# Altium PCB CPU_Board.PcbDoc
Units mm, origin at the board's own origin, x right, y up, seen from the top; angles counter-clockwise.
Board outline 88 x 42 mm, 2 copper layers (Top Layer, Bottom Layer); 72 components, 78 nets, 308 pads, 88 vias.
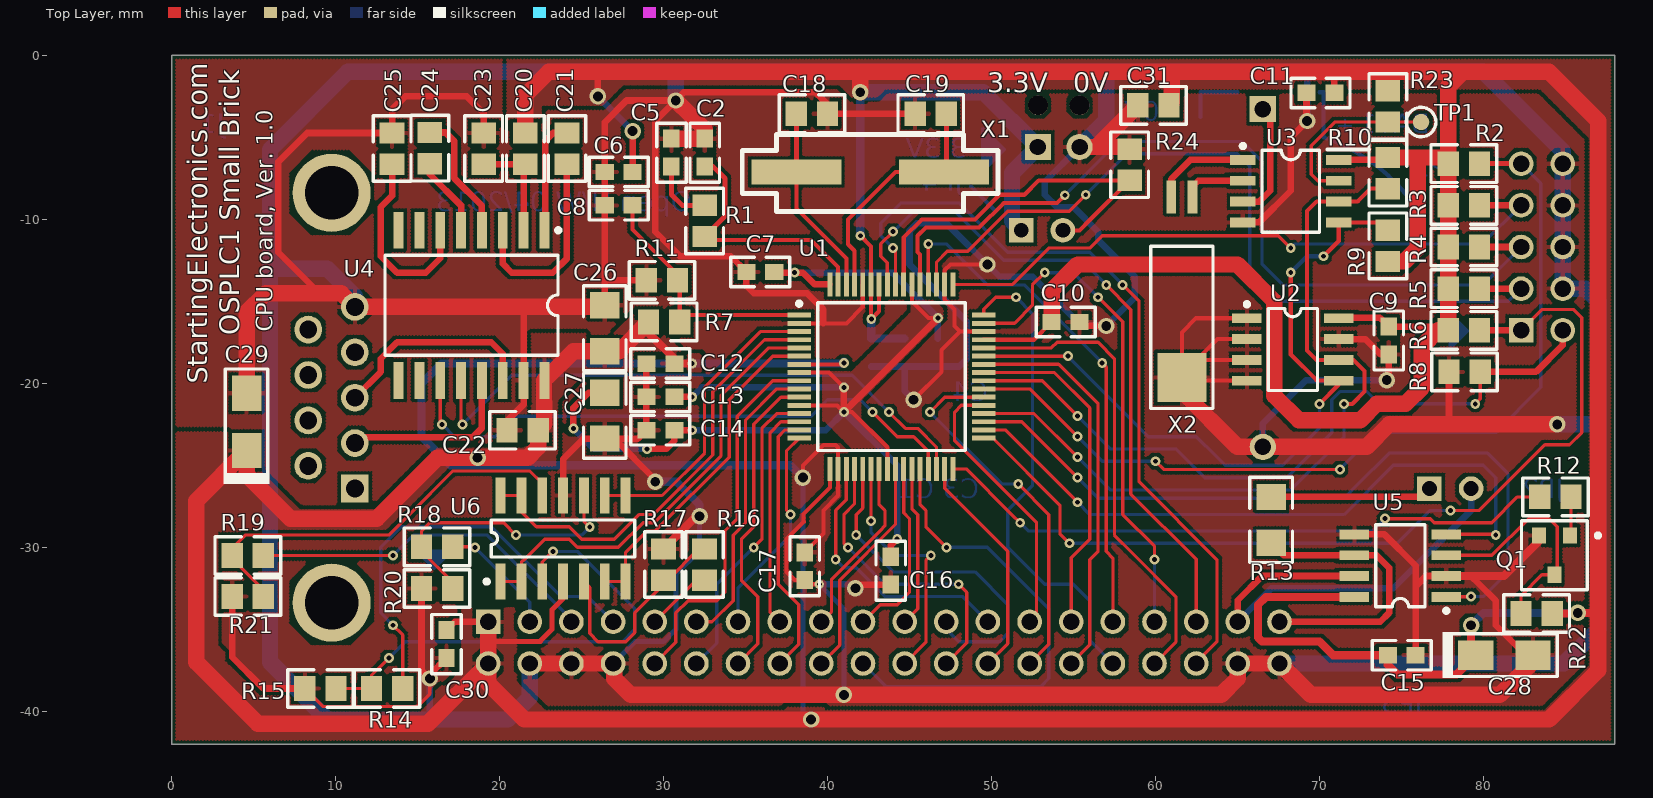
[diagram p0: Top Layer view]
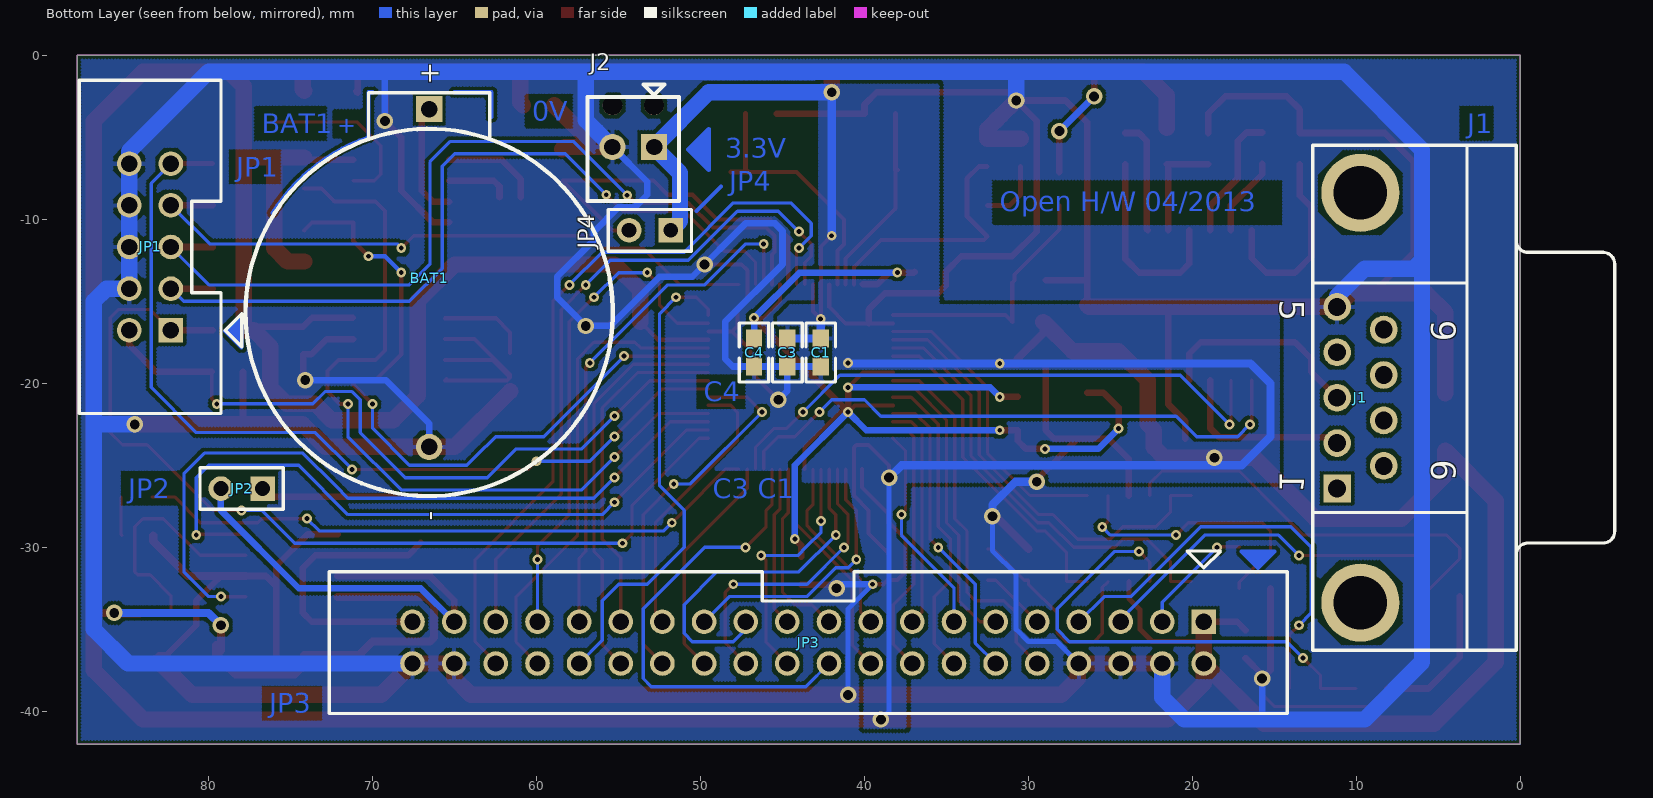
[diagram p1: Bottom Layer view, seen from below]

## Layer stack, top to bottom
Top Layer: signal copper 0.0356
Dielectric: dielectric 0.32, FR-4, Dk 4.8
Bottom Layer: signal copper 0.0356

## Board outline
0,-42 88,-42 88,0 0,0

## Design rules (kind name [scope] priority, off if disabled: settings)
Clearance [All] p1: gap=0.2
ComponentClearance [All] p1: gap=0.254 collisioncheckmode=0
HoleSize [All] p1: absolutevalues=TRUE maxlimit=5 minlimit=0.025 maxpercent=80.000 minpercent=20.000
PolygonConnect [All] p1: connectstyle=Relief reliefconductorwidth=0.254 reliefentries=4 polygonreliefangle="90 Angle"
RoutingLayers [All] p1: top layer=Horizontal bottom layer=Vertical
RoutingVias [All] p1: holewidth=0.3 width=0.6 viastyle="Through Hole" minholewidth=0.3 minwidth=0.6 maxholewidth=1 maxwidth=2
SolderMaskExpansion [All] p1: expansion=0.102
TestPointUsage [All] p1: valid=0 allowmultiple=FALSE
Testpoint [All] p1: side=15 testpointundercomponent=TRUE minsize=1.016 maxsize=2.54 preferedsize=1.524 minholesize=0 maxholesize=1.016 preferedholesize=0.813 testpointgrid=0.025 style=1023 order=-539222988
Width [All] p1: maxlimit=2 minlimit=0.2 preferedwidth=0.2 toplayer_prefwidth=0.25 minimp=50.000000 maximp=50.000000 favimp=50.000000
15 further rules are at their usual default settings.

## Components (designator, comment, footprint, x,y, rotation, side; value= is the part's Value field where it differs from the comment)
BAT1 "3V Battery" BATTERY_22MM 66.548,-23.876 r90 bottom
C1 "0603" 0603 42.672,-17.272 r270 bottom
C2 "0603" 0603 32.512,-5.08 r270 top
C3 "0603" 0603 44.704,-17.272 r270 bottom
C4 "0603" 0603 46.736,-17.272 r270 bottom
C5 "0603" 0603 30.48,-5.08 r270 top
C6 "0603" 0603 26.416,-7.112 r0 top (schematic designator C30)
C7 "0603" 0603 35.052,-13.208 r0 top (schematic designator C6)
C8 "0603" 0603 26.416,-9.144 r0 top (schematic designator C7)
C9 "0603" 0603 74.224,-16.536 r270 top (schematic designator C31)
C10 "0603" 0603 55.372,-16.256 r180 top (schematic designator C9)
C11 "0603" 0603 70.91,-2.29 r180 top (schematic designator C10)
C12 "0603" 0603 28.956,-18.796 r0 top (schematic designator C11)
C13 "0603" 0603 28.956,-20.828 r0 top (schematic designator C12)
C14 "0603" 0603 28.956,-22.86 r0 top (schematic designator C13)
C15 "0603" 0603 74.168,-36.576 r0 top (schematic designator C14)
C16 "0603" 0603 43.86,-30.574 r270 top (schematic designator C15)
C17 "0603" 0603 38.608,-32.004 r90 top (schematic designator C16)
C18 "0805" 0805 38.1,-3.556 r0 top (schematic designator C17)
C19 "0805" 0805 47.244,-3.556 r180 top (schematic designator C18)
C20 "0805" 0805 21.572,-4.732 r270 top (schematic designator C19)
C21 "0805" 0805 24.112,-4.732 r270 top (schematic designator C20)
C22 "0805" 0805 22.352,-22.86 r180 top (schematic designator C21)
C23 "0805" 0805 19.032,-4.732 r270 top (schematic designator C22)
C24 "0805" 0805 15.748,-6.604 r90 top (schematic designator C23)
C25 "0805" 0805 13.444,-4.732 r270 top (schematic designator C24)
C26 "1206 X7R" 1206 26.416,-15.24 r270 top
C27 "1206 X7R" 1206 26.416,-23.368 r90 top
C28 "Tant_A" CAP_TANT_A 81.28,-36.576 r180 top
C29 "Tant_A" CAP_TANT_A 4.572,-22.352 r270 top
C30 "0603" 0603 16.764,-35.052 r270 top
C31 "0805" 0805 58.928,-3.048 r0 top
J1 "DB9M" DB9M 11.176,-26.416 r270 bottom
J2 "Mini Screw Terminal" MINI_TERMINAL_2 55.372,-5.588 r180 bottom
JP1 "IDC10M" IDC_10M_BOX 82.296,-16.764 r270 bottom
JP2 "JUMPER2" JUMPER2_254 76.708,-26.416 r0 bottom
JP3 "IDC40M" IDC_40M_BOX 19.304,-34.544 r180 bottom
JP4 "JUMPER2" JUMPER2_254 51.816,-10.668 r0 bottom
Q1 "BC817-40" SO-G3/Y1 84.328,-30.48 r180 top
R1 "0805" 0805 32.512,-9.144 r270 top
R2 "0805" 0805 79.756,-6.604 r180 top
R3 "0805" 0805 79.756,-9.144 r180 top
R4 "0805" 0805 79.756,-11.684 r180 top
R5 "0805" 0805 79.756,-14.224 r180 top
R6 "0805" 0805 79.756,-16.764 r180 top
R7 "0805" 0805 30.988,-16.256 r180 top
R8 "0805" 0805 77.9,-19.3 r0 top
R9 "0805" 0805 74.168,-10.668 r270 top
R10 "0805" 0805 74.168,-8.128 r90 top
R11 "0805" 0805 28.956,-13.716 r0 top
R12 "0805" 0805 85.344,-26.924 r180 top
R13 "1206" 1206 67.056,-26.924 r270 top
R14 "0805" 0805 12.192,-38.608 r0 top
R15 "0805" 0805 8.128,-38.608 r0 top
R16 "0805" 0805 32.5,-30.1 r270 top
R17 "0805" 0805 30,-30.1 r270 top
R18 "0805" 0805 15.24,-29.972 r0 top
R19 "0805" 0805 3.7,-30.5 r0 top
R20 "0805" 0805 15.24,-32.512 r0 top
R21 "0805" 0805 3.7,-33 r0 top
R22 "0805" 0805 82.296,-34.036 r0 top
R23 "0805" 0805 74.168,-4.064 r90 top
R24 "0805" 0805 58.42,-7.62 r90 top
TP1 "TEST POINT" TEST_POINT 76.2,-4.064 r0 top
U1 "AT91SAM7S256" LQFP64-10-05 38.272,-15.842 r0 top
U2 "24LC64-I/SN" SO-G8/Z7.4 71.176,-16.028 r270 top
U3 "M41T00" SO-G8/X.6 71.176,-6.376 r270 top
U4 "MAX3232CWE" SO-G16/G6.9 18.288,-15.24 r180 top
U5 "ST3485EC" SO-G8/Z7.4 72.136,-33.02 r90 top
U6 "LM2902D" SO-G14/Y2.2 23.876,-29.464 r0 top
X1 "18.432MHz" CRYSTAL_SMT 38.1,-7.112 r0 top
X2 "32.768kHz" XTAL_TF 60.96,-8.636 r90 top

## Footprints (in the part's own frame and the unit in brackets; to place one, negate y for a bottom-side part, rotate by r counter-clockwise, add the part's x,y. Pads: shape width x height; smd on the part's side, far side on the other; paste and mask are expansions set on the pad)
0603 [mm]
  rect 1.1x1 smd: 1(0,0) 2(1.7,0)
  silkscreen extent -0.95,-0.9 2.65,0.9
0805 [mm]
  rect 1.3x1.5 smd: 1(0,0) 2(1.9,0)
  silkscreen extent -1.05,-1.15 2.95,1.15
1206 [mm]
  rect 1.6x1.8 smd: 1(0,0) 2(2.8,0)
  silkscreen extent -1.2,-1.3 4,1.3
BATTERY_22MM [mm] "Button battery, 22mm diameter"
  rect 1.6x1.6 hole 1: 1(20.6,0)
  round 1.6 hole 1: 2(0,0)
  silkscreen extent -3,-11.2 21.6,11.2
CAP_TANT_A [mm]
  rect 2.15x1.8 smd: 1(1.75,0) 2(-1.75,0)
  silkscreen extent -3.22,-1.4 3.77,1.4
CRYSTAL_SMT [mm] "Surface Mount Crystal"
  rect 5.5x1.5 smd: 1(0,0) 2(9,0)
  silkscreen extent -3.3,-2.4 12.3,2.3
DB9M [mm]
  rect 1.69x1.69 hole 1.09: 1(0,0)
  round 1.69 hole 1.09: 2(-2.77,0) 3(-5.54,0) 4(-8.31,0) 5(-11.08,0) 6(-1.385,2.84) 7(-4.155,2.84) 8(-6.925,2.84) 9(-9.695,2.84)
  round 4.76 hole 3.26: 10(6.955,1.42) 11(-18.035,1.42)
  silkscreen extent -20.94,-1.48 9.86,16.92
IDC_10M_BOX [mm]
  rect 1.5x1.5 hole 1: 1(0,0)
  round 1.5 hole 1: 2(0,-2.54) 3(-2.54,0) 4(-2.54,-2.54) 5(-5.08,0) 6(-5.08,-2.54) 7(-7.62,0) 8(-7.62,-2.54) 9(-10.16,0) 10(-10.16,-2.54)
  silkscreen extent -15.24,-5.59 5.08,4.32
IDC_40M_BOX [mm]
  rect 1.5x1.5 hole 1: 1(0,0)
  round 1.5 hole 1: 2(0,-2.54) 3(-2.54,0) 4(-2.54,-2.54) 5(-5.08,0) 6(-5.08,-2.54) 7(-7.62,0) 8(-7.62,-2.54) 9(-10.16,0) 10(-10.16,-2.54) 11(-12.7,0) 12(-12.7,-2.54) 13(-15.24,0) 14(-15.24,-2.54) 15(-17.78,0) 16(-17.78,-2.54) 17(-20.32,0) 18(-20.32,-2.54) 19(-22.86,0) 20(-22.86,-2.54) 21(-25.4,0) 22(-25.4,-2.54) 23(-27.94,0) 24(-27.94,-2.54) 25(-30.48,0) 26(-30.48,-2.54) 27(-33.02,0) 28(-33.02,-2.54) 29(-35.56,0) 30(-35.56,-2.54) 31(-38.1,0) 32(-38.1,-2.54) 33(-40.64,0) 34(-40.64,-2.54) 35(-43.18,0) 36(-43.18,-2.54) 37(-45.72,0) 38(-45.72,-2.54) 39(-48.26,0) 40(-48.26,-2.54)
  silkscreen extent -53.34,-5.59 5.08,4.32
JUMPER2_254 [mm]
  rect 1.5x1.5 hole 0.9: 1(0,0)
  round 1.5 hole 0.9: 2(2.54,0)
  silkscreen extent -1.27,-1.27 3.81,1.27
LQFP64-10-05 [mm] "LQFP64 10 x 10 x 1.4mm"
  rect 1.45x0.3 smd: 1(0,0) 2(0,-0.5) 3(0,-1) 4(0,-1.5) 5(0,-2) 6(0,-2.5) 7(0,-3) 8(0,-3.5) 9(0,-4) 10(0,-4.5) 11(0,-5) 12(0,-5.5) 13(0,-6) 14(0,-6.5) 15(0,-7) 16(0,-7.5) 33(11.25,-7.5) 34(11.25,-7) 35(11.25,-6.5) 36(11.25,-6) 37(11.25,-5.5) 38(11.25,-5) 39(11.25,-4.5) 40(11.25,-4) 41(11.25,-3.5) 42(11.25,-3) 43(11.25,-2.5) 44(11.25,-2) 45(11.25,-1.5) 46(11.25,-1) 47(11.25,-0.5) 48(11.25,0)
  rect 0.3x1.45 smd: 17(1.875,-9.375) 18(2.375,-9.375) 19(2.875,-9.375) 20(3.375,-9.375) 21(3.875,-9.375) 22(4.375,-9.375) 23(4.875,-9.375) 24(5.375,-9.375) 25(5.875,-9.375) 26(6.375,-9.375) 27(6.875,-9.375) 28(7.375,-9.375) 29(7.875,-9.375) 30(8.375,-9.375) 31(8.875,-9.375) 32(9.375,-9.375) 49(9.375,1.875) 50(8.875,1.875) 51(8.375,1.875) 52(7.875,1.875) 53(7.375,1.875) 54(6.875,1.875) 55(6.375,1.875) 56(5.875,1.875) 57(5.375,1.875) 58(4.875,1.875) 59(4.375,1.875) 60(3.875,1.875) 61(3.375,1.875) 62(2.875,1.875) 63(2.375,1.875) 64(1.875,1.875)
  silkscreen extent -0.12,-8.25 10.12,0.82
MINI_TERMINAL_2 [mm] "2 pin mini screw terminal, 2.54mm spacing"
  round 1.2 hole 1.2 unplated: 0(0,2.54) 0(2.54,2.54)
  rect 1.6x1.6 hole 1: 1(2.54,0)
  round 1.6 hole 1: 2(0,0)
  silkscreen extent -1.52,-3.3 4.06,3.81
SO-G3/Y1 [mm]
  rect 0.85x1 smd: 1(-0.95,-1.2) 2(0.95,-1.2) 3(0,1.2)
  silkscreen extent -2.78,-2.1 2,2.1
SO-G8/X.6 [mm]
  rect 0.6x1.55 smd: 1(0,-5.85) 2(1.27,-5.85) 3(2.54,-5.85) 4(3.81,-5.85) 5(3.81,0) 6(2.54,0) 7(1.27,0) 8(0,0)
  silkscreen extent -0.97,-5.97 4.4,-1.18
SO-G8/Z7.4 [mm]
  rect 0.6x1.8 smd: 1(0,-5.6) 2(1.27,-5.6) 3(2.54,-5.6) 4(3.81,-5.6) 5(3.81,0) 6(2.54,0) 7(1.27,0) 8(0,0)
  silkscreen extent -0.97,-5.72 4.41,-1.3
SO-G14/Y2.2 [mm]
  rect 0.6x2.2 smd: 1(-3.81,-2.625) 2(-2.54,-2.625) 3(-1.27,-2.625) 4(0,-2.625) 5(1.27,-2.625) 6(2.54,-2.625) 7(3.81,-2.625) 8(3.81,2.625) 9(2.54,2.625) 10(1.27,2.625) 11(0,2.625) 12(-1.27,2.625) 13(-2.54,2.625) 14(-3.81,2.625)
  silkscreen extent -4.78,-2.75 4.38,1.13
SO-G16/G6.9 [mm]
  rect 0.6x2.25 smd: 1(-4.445,-4.575) 2(-3.175,-4.575) 3(-1.905,-4.575) 4(-0.635,-4.575) 5(0.635,-4.575) 6(1.905,-4.575) 7(3.175,-4.575) 8(4.445,-4.575) 9(4.445,4.575) 10(3.175,4.575) 11(1.905,4.575) 12(0.635,4.575) 13(-0.635,4.575) 14(-1.905,4.575) 15(-3.175,4.575) 16(-4.445,4.575)
  silkscreen extent -5.42,-4.7 5.27,3.05
TEST_POINT [mm]
  round 1 smd: 1(0,0)
  silkscreen extent -0.9,-0.9 0.9,0.9
XTAL_TF [mm]
  rect 2x0.6 smd: 1(0,0) 2(0,-1.3)
  rect 3x3 smd: 3(-11,-0.65)
  silkscreen extent -12.9,-2.55 -3,1.25

## Part data
BAT1: library part BATTERY_22MM, "3 Volt Lithium Button Battery"
C1 C2 C3 C4 C5 C6 C7 C8 C9 C10 C11 C12 C13 C14 C15 C16 C17 C30: library part CAP_0603, "0603 footprint non-polorised capacitor"
C18 C19 C20 C21 C22 C23 C24 C25 C31: library part CAP_0805, "0805 footprint non-polarised capacitor"
C26 C27: library part CAP_1206, "1206 footprint non-polorised capacitor"
C28 C29: library part CAP_TANT_A, "Tantalum Capacitor, A Package"
J1: "DB 9 Male connector"
J2: library part MINI_TERMINAL_2, "Mini Screw Terminal, 2.54mm Pitch"
JP1: library part IDC_10M, "10 pin IDC male connector, vertical, box"
JP2 JP4: "2 Pin Jumper, 2.54mm"
JP3: library part IDC_40M, "40 pin IDC male connector, vertical, box"
Q1: "NPN General Purpose Amplifier"
R1 R2 R3 R4 R5 R6 R7 R8 R9 R10 R11 R12 R14 R15 R16 R17 R18 R19 R20 R21 R22 R23 R24: library part RES_0805, "0805 footprint resistor"
R13: library part RES_1206, "1206 footprint resistor"
TP1: library part TEST_POINT
U1: "Atmel ARM7 microcontroller, 256k Flash"
U2: "Microchip 64k bit I2C bus serial EEPROM"
U3: "ST Serial Access Timekeeper"
U4: "3.0V TO 5.5V, Low-Power, up to 1Mbps, True RS-232 Transceiver Using Four 0.1µF External Capacitor"
U5: "ST 3.3v RS-485/RS-422 Transceiver"
U6: "Quad Low-Power Operational Amplifier"
X1: library part CRYSTAL_SMT, "SMT crystal"
X2: library part CRYSTAL_TF, "Tuning Fork Crystal"

## Via types
v1: diameter 0.6, hole 0.3, Top Layer to Bottom Layer, 68 vias
v2: diameter 1, hole 0.6, Top Layer to Bottom Layer, 20 vias

## Nets (pads, with @x,y where several pads share a name; then routed paths per layer and width w, separated by ;. In a path a pad name is that pad's centre, name@x,y a point inside that pad or via, vN(x,y) a via of type N, cw(c..) or ccw(c..) an arc to the next point about the centre after c; other vN are vias at no path point)
AD4: U1.3 U6.8 U6.9 | length 18.3
  Top Layer w0.2: U6.9 29.911,-26.839 32.5,-24.25 32.5,-20.25 35.908,-16.842 U1.3
AD5: U1.4 U6.13 U6.14 | length 27.2
  Top Layer w0.2: U6.14 U6.13 21.336,-27.836 22.25,-28.75 24.25,-28.75 25,-29.5 27,-29.5 28.338,-28.162 28.5,-28 29.369,-28 33,-24.369 33,-20.5 36.158,-17.342 U1.4
AD6: U1.5 U6.1 U6.2 | length 27.4
  Top Layer w0.2: U6.1 U6.2 21.336,-30.914 21.567,-30.683 22.75,-29.5 24.25,-29.5 24.75,-30 27.25,-30 28.75,-28.5 29.434,-28.5 33.5,-24.434 33.5,-20.75 36.408,-17.842 U1.5
AD7: U1.6 U6.6 U6.7 | length 20.6
  Top Layer w0.2: U6.6 U6.7 27.686,-30.314 29,-29 29.5,-29 34,-24.5 34,-21 36.658,-18.342 U1.6
AN1: JP3.3 R18.2 | length 7.3
  Top Layer w0.2: R18.2 18.472,-29.972 v1(18.5,-30)
  Bottom Layer w0.2: v1(18.5,-30) 21.844,-33.344 JP3.3
AN2: JP3.5 R19.2 | length 21.6
  Top Layer w0.2: R19.2 v1(13.5,-30.5)
  Bottom Layer w0.2: v1(13.5,-30.5) 14.75,-29.25 19.25,-29.25 24.384,-34.384 JP3.5
AN3: JP3.7 R14.2 | length 26.3
  Top Layer w0.2: v1(13.5,-34.75) 14.092,-35.342 R14.2
  Bottom Layer w0.2: v1(13.5,-34.75) 12.75,-34 12.75,-30 14,-28.75 19.5,-28.75 23.75,-33 25.38,-33 JP3.7
AN4: JP3.9 R16.2 | length 4.1
  Top Layer w0.2: JP3.9 29.464,-34.536 32,-32 R16.2
DDM: JP3.36 U1.56 | length 47.4
  Top Layer w0.2: v1(44,-11.75) 44.147,-11.897 U1.56 ; v1(58,-14) 59,-15 59,-26 63.75,-30.75 63.75,-35.75 62.484,-37.016 JP3.36
  Bottom Layer w0.2: v1(44,-11.75) 43.25,-11 43.25,-10.25 44.5,-9 48,-9 51,-12 56,-12 v1(58,-14)
DDP: JP3.35 U1.57 | length 41.9
  Top Layer w0.2: U1.57 43.647,-12.647 43.25,-12.25 43.25,-11.5 v1(44,-10.75) ; v1(57,-14) 58.5,-15.5 58.5,-26.75 62.484,-30.734 JP3.35
  Bottom Layer w0.2: v1(44,-10.75) 45.25,-9.5 47.75,-9.5 50.75,-12.5 55.5,-12.5 v1(57,-14)
DRXD: U1.30 U4.12 | length 36
  Top Layer w0.2: U4.12 17.653,-22.403 v1(17.75,-22.5) ; v1(43.75,-21.75) 44.75,-22.75 45.5,-22.75 46.647,-23.897 U1.30
  Bottom Layer w0.2: v1(17.75,-22.5) 20.75,-19.5 41.5,-19.5 v1(43.75,-21.75)
DTXD: U1.29 U4.11 | length 36
  Top Layer w0.2: U4.11 16.383,-22.383 v1(16.5,-22.5) ; v1(42.75,-21.75) 44.25,-23.25 45.25,-23.25 46.147,-24.147 U1.29
  Bottom Layer w0.2: v1(16.5,-22.5) 17.25,-23.25 19.75,-23.25 21,-22 39,-22 40,-21 42,-21 v1(42.75,-21.75)
GND: BAT1.2 C1.2 C2.1 C3.2 C4.2 C5.1 C6.1 C7.1 C8.1 C9.2 C10.1 C11.2 C12.1 C13.1 C14.1 C15.2 C16.2 C17.1 C18.2 C19.2 C22.2 C23.1 C25.1 C26.1 C27.1 C28.2 C29.2 C30.2 C31.1 J1.5 J2.2 JP1.4 JP1.6 JP1.8 JP1.10 JP3.4 JP3.6 JP3.8 JP3.38 JP3.40 Q1.2 R8.1 R11.1 R15.1 R17.1 R20.1 R21.1 R24.2 U1.2 U1.17 U1.46 U1.50 U1.60 U2.1 U2.2 U2.3 U2.4 U2.7 U3.4 U4.15 U5.2 U5.5 U6.11 X2.3 | length 651.8
  Top Layer w0.2: R15.1 9.22,-39.7 15,-39.7 15.75,-38.95 v2(15.75,-38) ; U1.17@40.147,-25.353 U1.17
  Top Layer w0.25: U1.2 41.158,-16.342 42.147,-15.353 U1.60 ; 38.542,-28.442 38.542,-27.958 40.147,-26.353 U1.17 ; 38.55,-28.45 37.5,-29.5 37.5,-31.5 38.004,-32.004 C17.1 38.854,-32.25 v1(39.5,-32.25) ; v2(45.25,-21) 46.955,-19.295 46.955,-17.979 48.092,-16.842 ; U1.46 48.092,-16.842 ; v2(49.75,-12.75) 47.5,-12.75 47.147,-13.103 47.147,-14.897 47.75,-15.5 47.75,-16.5 48.092,-16.842 ; X2.3@61.61,-18.14 61.61,-16.89 62.472,-16.028 U2.1 ; U2.4@65.5,-19.762 U2.4@65.5,-19.75 ; U2.4 61.812,-19.838 X2.3 ; U2.3 62.678,-18.568 X2.3 ; U2.2 63.776,-17.298 61.61,-19.464 X2.3
  Top Layer w0.4: R21.1 3.7,-36.7 5.608,-38.608 R15.1 ; 9,-14.5 6.5,-12 6.5,-6.5 8.268,-4.732 C25.1 13.444,-3.306 14.25,-2.5 18,-2.5 19.032,-3.532 C23.1 ; R20.1 15.24,-37.49 v2(15.75,-38) 15.75,-37.766 C30.2 ; C22.2@20.452,-23.368 20.452,-22.298 21.463,-21.287 21.463,-15.373 21.5,-15.336 ; U6.11 23.876,-24.624 25.132,-23.368 26.992,-23.368 29.5,-25.876 v2(29.5,-26) ; C27.1 C27.1@26.424,-23.376 ; 26.416,-13.75 26.45,-13.716 R11.1 ; C26.1@26.45,-15.206 C26.1 C8.1 C6.1 26.416,-4.084 27.75,-2.75 v2(30.75,-2.75) ; C27.1@27,-23.376 28.44,-23.376 C14.1 C13.1 C12.1 ; 39.75,-16.342 39.75,-15.5 38.75,-14.5 35.5,-14.5 35.052,-14.052 C7.1 34.094,-12.25 31,-12.25 29.5,-10.75 29.5,-4 31.25,-2.25 39.25,-2.25 40,-3 C18.2 C19.2 ; v2(41.7,-32.5) 41.926,-32.274 C16.2 ; C10.1 55.616,-16.5 v2(57,-16.5) ; U3.4 66.314,-10.186 68.25,-8.25 68.25,-5 v2(69.25,-4) ; v2@69.21,-3.96 C11.2 ; U2.7 72.798,-17.298 73.736,-18.236 C9.2 74.224,-19.676 v2(74.1,-19.8) ; U5.5 73.96,-29.21 75.868,-31.118 C15.2 ; 75.868,-32.382 76.5,-31.75 U5.2 ; 77.75,-22.5 77.9,-22.35 R8.1 ; 79.25,-31.75 79.75,-32.25 80.75,-33.25 80.75,-34.75 82.576,-36.576 C28.2
  Top Layer w0.5: R17.1 32,-28.1 v2(32.2,-28.1) ; U5.2 81.25,-31.75 83.378,-29.622 Q1.2
  Top Layer w1: C29.2 4.572,-15.678 5.75,-14.5 10.34,-14.5 J1.5 26.32,-15.336 C26.1 ; JP3.4 JP3.6 26.916,-37.084 27,-37 27,-38 28,-39 64,-39 65.024,-37.976 JP3.38 JP3.40@67.584,-37.084 ; C5.1 C2.1 32.512,-4.512 31.655,-3.655 ; v2(30.75,-2.75) 31.655,-3.655 ; 32.004,-4.004 31.655,-3.655 ; J2.2 58.288,-5.588 R24.2 ; 56.388,-5.588 C31.1 ; X2.3@61.61,-20.486 65,-23.876 72.874,-23.876 74.25,-22.5 v2(84.5,-22.5) ; JP3.40 69.48,-39 81,-39 C28.2@83.03,-36.97
  Bottom Layer w0.3: JP3.8 28.258,-35.75 30,-35.75 30.75,-35 30.75,-31.65 32.2,-30.2 v2(32.2,-28.1) ; v1(39.5,-32.25) 41,-33.75 v2(41,-39)
  Bottom Layer w0.4: 15.75,-40.5 v2(15.75,-38) ; v1(39.5,-32.25) 41.45,-32.25 v2(41.7,-32.5) ; C1.2 C4.2 48.028,-18.972 48.5,-18.5 48.5,-16.25 45,-12.75 45,-10.708 45.458,-10.25 47.25,-10.25 50.5,-13.5 52.5,-13.5 55.5,-16.5 v2(57,-16.5) 57.408,-16.092 58.75,-14.75 58.75,-13.5 56.5,-11.25 56.5,-10.75 55,-9.25 54,-9.25 53.25,-8.5 53.25,-7.71 J2.2 ; C3.2 44.704,-20.454 v2(45.25,-21) ; BAT1.2 66.548,-22.452 69.2,-19.8 v2(74.1,-19.8) ; v2(69.25,-4) 69.25,-1
  Bottom Layer w0.5: v2(29.5,-26) 30.8,-26 32.2,-27.4 v2(32.2,-28.1)
  Bottom Layer w1: 6,-12.5 6.5,-13 9.5,-13 11.176,-14.676 J1.5 ; JP3.4 21.844,-39.156 20.5,-40.5 9.5,-40.5 6,-37 6,-5.75 10.75,-1 80,-1 84.836,-5.836 JP1.8 JP1.6 JP1.4 86.224,-14.224 87,-15 87,-35 84.916,-37.084 JP3.40 ; v2(30.75,-2.75) 30.75,-1.25 ; J2.2 56.324,-4.636 57,-3.96 57,-1 ; v2(84.5,-22.5) 87,-22.5
NetBAT1_1: BAT1.1 U3.3 | length 7.1
  Top Layer w0.4: U3.3 66.334,-8.916 67,-8.25 67,-3.728 BAT1.1
NetC2_2: C2.2 R1.2 U1.63 | length 15.6
  Top Layer w0.25: R1.2 32.718,-11.25 39,-11.25 40.647,-12.897 U1.63
  Top Layer w0.3: R1.2 33.75,-9.806 33.75,-7.5 33.03,-6.78 C2.2
NetC5_2: C5.2 R1.1 | length 4
  Top Layer w0.3: C5.2 30.48,-8.48 31.144,-9.144 R1.1
NetC8_2: C8.2 R7.1 R11.2 U1.1 | length 15.8
  Top Layer w0.25: C8.2 28.116,-10.616 30.856,-13.356 R11.2 30.988,-13.848 R7.1 31.402,-15.842 U1.1
NetC18_1: C18.1 U1.62 X1.1 | length 11.8
  Top Layer w0.25: X1.1@38.1,-7 38.1,-9.35 41.147,-12.397 U1.62
  Top Layer w0.3: X1.1@38,-7 X1.1@38.1,-6.9 ; X1.1@38.1,-7 C18.1
NetC19_1: C19.1 U1.61 X1.2 | length 15.8
  Top Layer w0.25: U1.61 41.647,-11.914 41.25,-11.517 41.25,-10 44.138,-7.112 X1.2
  Top Layer w0.3: C19.1 47.244,-6.968 X1.2 X1.2@48.138,-7.112
NetC20_2: C20.2 C23.2 U4.2 | length 6.6
  Top Layer w0.4: C23.2 C20.2 21.463,-6.741 U4.2
NetC21_1: C21.1 U4.1 | length 7
  Top Layer w0.4: U4.1 22.8,-10.598 22.8,-5.2 23.268,-4.732 C21.1
NetC21_2: C21.2 U4.3 | length 12.3
  Top Layer w0.4: U4.3 20.193,-12.693 20.75,-13.25 23.25,-13.25 24.112,-12.388 C21.2
NetC24_1: C24.1 U4.5 | length 4.9
  Top Layer w0.4: C24.1 15.748,-7.248 17.653,-9.153 U4.5
NetC24_2: C24.2 U4.4 | length 7.8
  Top Layer w0.4: C24.2 16.704,-4.704 17.25,-5.25 17.25,-7.5 18.923,-9.173 U4.4
NetC25_2: C25.2 U4.6 | length 12
  Top Layer w0.4: C25.2 13.444,-8.556 12.75,-9.25 12.75,-12.25 13.75,-13.25 15.5,-13.25 16.383,-12.367 U4.6
NetJ1_2: J1.2 U4.13 | length 11
  Top Layer w0.4: J1.2 11.522,-23.3 18.346,-23.3 18.923,-22.723 U4.13
NetJ1_3: J1.3 U4.14 | length 12.8
  Top Layer w0.4: J1.3 12.75,-19.302 12.75,-18.5 13.75,-17.5 19.5,-17.5 20.193,-18.193 U4.14
NetJP1_1: JP1.1 R6.1 U1.33 | length 56.9
  Top Layer w0.2: U1.33 50.092,-23.342 54.177,-27.427 54.177,-29.177 v1(54.75,-29.75) ; v1(78,-27.75) 79.75,-27.75 83.75,-23.75 85.25,-23.75 86,-23 86,-16 85.5,-15.5 83.56,-15.5 JP1.1
  Top Layer w0.4: R6.1 JP1.1
  Bottom Layer w0.2: v1(54.75,-29.75) 74.75,-29.75 76.75,-27.75 v1(78,-27.75)
NetJP1_2: JP1.2 R8.2 U1.40 | length 44.8
  Top Layer w0.2: U1.40 53.092,-19.842 v1(55.25,-22) ; v1(79.5,-21.25) 79.8,-20.95 R8.2
  Top Layer w0.4: R8.2 83.2,-19.3 84.836,-17.664 JP1.2
  Bottom Layer w0.2: v1(55.25,-22) 57.25,-24 61.25,-24 63,-25.75 68,-25.75 70.75,-23 70.75,-21 71.25,-20.5 72.9,-20.5 73.65,-21.25 v1(79.5,-21.25)
NetJP1_3: JP1.3 R5.1 U1.51 | length 50
  Top Layer w0.2: U1.51 46.647,-12.603 47.305,-11.945 48.555,-11.945 51,-9.5 54.75,-9.5 v1(55.75,-8.5)
  Top Layer w0.4: R5.1 JP1.3
  Bottom Layer w0.2: v1(55.75,-8.5) 58.25,-6 65,-6 65.75,-6.75 65.75,-13 67.75,-15 81.52,-15 JP1.3
NetJP1_5: JP1.5 R4.1 U1.53 | length 53
  Top Layer w0.25: U1.53 45.647,-12.147 45.5,-12 45.5,-11 46,-10.5 49.25,-10.5 50.75,-9 54,-9 v1(54.472,-8.528)
  Top Layer w0.4: R4.1 JP1.5
  Bottom Layer w0.2: v1(54.472,-8.528) 56.42,-6.58 57.75,-5.25 65.25,-5.25 66.5,-6.5 66.5,-12.75 67.75,-14 79.98,-14 JP1.5
NetJP1_7: JP1.7 R3.1 U1.49 | length 39.8
  Top Layer w0.2: U1.49 51.283,-13.967 53.5,-11.75 56,-11.75 56.75,-11 67.5,-11 v1(68.25,-11.75)
  Top Layer w0.4: R3.1 JP1.7
  Bottom Layer w0.2: v1(68.25,-11.75) 68.5,-11.5 79.94,-11.5 JP1.7
NetJP1_9: JP1.9 R2.1 U1.39 | length 54.8
  Top Layer w0.2: U1.39 52.342,-20.342 v1(55.25,-23.25) ; v1(60,-24.75) 60.5,-25.25 v1(71.25,-25.25)
  Top Layer w0.3: R2.1 JP1.9
  Bottom Layer w0.2: v1(55.25,-23.25) 56.75,-24.75 v1(60,-24.75) ; v1(71.25,-25.25) 73.5,-23 80.75,-23 83.5,-20.25 83.5,-7.808 JP1.9
NetJP2_1: JP2.1 R13.1 | length 9.9
  Top Layer w0.4: R13.1 76.2,-26.924 JP2.1
NetJP2_2: JP2.2 JP3.37 U5.7 | length 27.4
  Top Layer w0.4: JP3.37 65.024,-33.226 66.5,-31.75 U5.7
  Bottom Layer w0.4: JP3.37 67.068,-32.5 74.5,-32.5 79.248,-27.752 JP2.2
NetJP3_39: JP3.39 R13.2 U5.6 | length 17.5
  Top Layer w0.4: R13.2 67.812,-30.48 U5.6 73.48,-30.48 74.25,-31.25 74.25,-34 73.706,-34.544 JP3.39
NetJP4_2: JP4.2 R24.1 U1.55 | length 23.4
  Top Layer w0.25: U1.55 44.647,-11.103 45.75,-10 49,-10 50.5,-8.5 52,-8.5 52.88,-7.62 R24.1 56.017,-10.023 55.372,-10.668 JP4.2
NetQ1_1: Q1.1 R12.1 | length 2.4
  Top Layer w0.2: Q1.1 85.344,-29.214 R12.1
NetQ1_3: Q1.3 R22.1 U5.3 | length 14.5
  Top Layer w0.2: U5.3 80.52,-30.48 82.75,-28.25 84,-28.25 84.5,-28.75 84.5,-31.508 Q1.3 83.57,-31.68 82.296,-32.954 R22.1
NetR12_2: R12.2 U1.32 | length 38.4
  Top Layer w0.2: U1.32 48.467,-25.217 51.25,-28 v1(51.75,-28.5) ; v1(74,-28.25) 76.75,-28.25 77,-28.5 80.5,-28.5 82.076,-26.924 R12.2
  Bottom Layer w0.2: v1(51.75,-28.5) 52.25,-29 73.25,-29 v1(74,-28.25)
NetR14_1: R14.1 R15.2 U6.3 | length 30
  Top Layer w0.2: R15.2 R14.1 12.192,-37.808 v1(13.25,-36.75) ; U6.3 22.606,-30.894 v1(23.25,-30.25)
  Bottom Layer w0.2: v1(13.25,-36.75) 14.25,-35.75 27.5,-35.75 28.25,-35 28.25,-33.75 24.75,-30.25 v1(23.25,-30.25)
NetR16_1: R16.1 R17.2 U6.5 | length 13.7
  Top Layer w0.2: U6.5 25.5,-32.443 25.5,-35.25 26,-35.75 27.7,-35.75 28.25,-35.2 28.25,-34 30,-32.25 R17.2 30.25,-32 32.15,-30.1 R16.1
NetR18_1: R18.1 R20.2 U6.10 | length 17.3
  Top Layer w0.2: R20.2 17.14,-32.14 15.24,-30.24 15.24,-29.01 15.75,-28.5 20.25,-28.5 v1(21,-29.25) ; U6.10 25.146,-28.396 v1(25.5,-28.75)
  Bottom Layer w0.2: v1(21,-29.25) 25,-29.25 v1(25.5,-28.75)
NetR19_1: R19.1 R21.2 U6.12 | length 25.6
  Top Layer w0.2: R21.2 5.6,-32.6 3.7,-30.7 3.7,-30.05 4.5,-29.25 13.25,-29.25 14.464,-28.036 17.154,-25.346 21.846,-25.346 22.606,-26.106 U6.12
NetR23_1: R23.1 TP1.1 U3.7 | length 10.9
  Top Layer w0.2: U3.7 69.896,-7.646 69.5,-7.25 69.5,-5.5 70.936,-4.064 TP1.1
NetU1_34: U1.34 U5.4 | length 41.4
  Top Layer w0.2: U1.34 50.842,-22.842 v1(55.25,-27.25) ; U5.4 80.71,-29.21 v1(80.75,-29.25)
  Bottom Layer w0.2: v1(55.25,-27.25) 56,-28 71.5,-28 74.5,-25 80,-25 80.75,-25.75 v1(80.75,-29.25)
NetU1_35: U1.35 U5.1 | length 46
  Top Layer w0.2: U1.35 51.842,-22.342 v1(55.25,-25.75) ; U5.1 79.23,-33.02 v1(79.25,-33)
  Bottom Layer w0.2: v1(55.25,-25.75) 56.5,-27 71.5,-27 72.25,-26.25 74.25,-24.25 80.25,-24.25 81.5,-25.5 81.5,-31.5 80,-33 v1(79.25,-33)
NetU3_1: U3.1 X2.1 | length 5.9
  Top Layer w0.4: X2.1 60.96,-7.54 62.124,-6.376 U3.1
NetU3_2: U3.2 X2.2 | length 3.9
  Top Layer w0.4: X2.2 62.26,-7.99 62.604,-7.646 U3.2
PA0: JP3.32 U1.48 | length 29.7
  Top Layer w0.2: U1.48 49.522,-15.478 50.25,-14.75 v1(51.5,-14.75)
  Bottom Layer w0.2: v1(51.5,-14.75) 52.5,-15.75 52.5,-26.25 51,-27.75 51,-30 53.25,-32.25 55,-32.25 56,-33.25 56,-35.68 JP3.32
PA1: JP3.33 U1.47 | length 30.8
  Top Layer w0.2: U1.47 51.408,-16.342 52.5,-15.25 52.5,-14 v1(53.25,-13.25) ; v1(56.5,-14.75) 58,-16.25 58,-28 59.944,-29.944 v1(59.944,-30.75)
  Bottom Layer w0.2: v1(53.25,-13.25) 55,-13.25 v1(56.5,-14.75) ; JP3.33 v1(59.944,-30.75)
PA2: JP3.34 U1.44 | length 29.2
  Top Layer w0.2: U1.44 53.658,-17.842 54,-17.5 56.5,-17.5 57.5,-18.5 57.5,-29.25 58.625,-30.375 61.25,-33 61.25,-35.778 JP3.34
PA8: JP3.26 U1.31 | length 14
  Top Layer w0.2: U1.31 47.147,-26.397 51,-30.25 51,-35.868 JP3.26
PA11: JP3.20 U1.28 | length 29.6
  Top Layer w0.2: U1.28 45.647,-27.397 46,-27.75 46,-28.75 v1(47.25,-30)
  Bottom Layer w0.2: JP3.20 43.58,-38.5 53,-38.5 53.5,-38 53.5,-33.75 49.75,-30 v1(47.25,-30)
PA12: JP3.21 U1.27 | length 9.8
  Top Layer w0.2: JP3.21 45.5,-33.748 45.5,-28 45.147,-27.647 U1.27
PA13: JP3.22 U1.22 | length 15.4
  Top Layer w0.2: v1(42.647,-28.397) U1.22 ; JP3.22 46,-35.788 46,-30.8 v1(46.3,-30.5)
  Bottom Layer w0.2: v1(42.647,-28.397) 42.647,-29.081 43.508,-29.942 44.066,-30.5 v1(46.3,-30.5)
PA14: JP3.23 U1.21 | length 21.7
  Top Layer w0.2: v1(41.75,-29.25) 41.75,-28 42.147,-27.603 U1.21
  Bottom Layer w0.2: v1(41.75,-29.25) 44,-31.5 49,-31.5 51,-33.5 51,-35.25 50.5,-35.75 48,-35.75 47.244,-34.994 JP3.23
PA15: JP3.24 U1.20 | length 18.4
  Top Layer w0.2: v1(41.25,-30) 41,-29.75 41,-28 41.647,-27.353 U1.20 ; JP3.24 48.5,-35.828 48.5,-32.75 v1(48,-32.25)
  Bottom Layer w0.2: v1(41.25,-30) 43.5,-32.25 v1(48,-32.25)
PA16: JP3.25 U1.19 | length 16.7
  Top Layer w0.2: v1(40.5,-30.75) 40.5,-27.75 41.147,-27.103 U1.19
  Bottom Layer w0.2: v1(40.5,-30.75) 40.987,-31.237 41.75,-31.237 43.513,-33 48.24,-33 JP3.25
PA17: JP3.10 U1.9 | length 22.9
  Top Layer w0.2: JP3.10 30.75,-35.798 30.75,-34 31.5,-33.25 33.25,-33.25 33.75,-32.75 33.75,-29 34.5,-28.25 34.5,-22 36.658,-19.842 U1.9
PA18: JP3.11 U1.10 | length 18.2
  Top Layer w0.2: JP3.11 32.956,-34.544 34.25,-33.25 34.25,-29.25 35,-28.5 35,-22.25 36.908,-20.342 U1.10
PA19: JP3.12 U1.13 | length 18.6
  Top Layer w0.2: v1(35.5,-30) 36,-29.5 36,-22.75 36.908,-21.842 U1.13
  Bottom Layer w0.2: JP3.12 33.25,-35.838 33.25,-32.25 v1(35.5,-30)
PA20: JP3.13 U1.16 | length 13
  Top Layer w0.2: v1(37.75,-28) 37.5,-27.75 37.5,-24.114 U1.16
  Bottom Layer w0.2: JP3.13 34.544,-32.456 37.75,-29.25 v1(37.75,-28)
PA21: JP3.14 U1.11 | length 19.3
  Top Layer w0.2: JP3.14 35.75,-35.878 35.75,-33 34.75,-32 34.75,-29.5 35.5,-28.75 35.5,-22.5 37.158,-20.842 U1.11
PA22: JP3.15 U1.14 | length 13.8
  Top Layer w0.2: JP3.15 36.5,-33.96 36.5,-23 37.158,-22.342 U1.14
PA23: JP3.16 U1.15 | length 16.3
  Top Layer w0.2: JP3.16 38.25,-35.918 38.25,-33.5 37,-32.25 37,-23.25 37.408,-22.842 U1.15
PA24: JP3.17 U1.23 | length 11.1
  Top Layer w0.2: JP3.17 40.25,-33.918 40.25,-31.934 43.208,-28.977 43.5,-28.684 43.5,-27.75 43.147,-27.397 U1.23
PA25: JP3.18 U1.25 | length 13.7
  Top Layer w0.2: JP3.18 40.75,-35.958 40.75,-32 44.147,-28.603 U1.25
PA26: JP3.19 U1.26 | length 11.3
  Top Layer w0.2: JP3.19 43.208,-33.5 44.25,-33.5 45,-32.75 45,-28.25 44.647,-27.897 U1.26
PA27: JP3.27 U1.37 | length 17
  Top Layer w0.2: U1.37 48.158,-21.342 47.75,-21.75 47.75,-23.5 49.861,-25.611 52.75,-28.5 52.75,-34.118 JP3.27
PA28: JP3.28 U1.38 | length 23.1
  Top Layer w0.2: v1(46.25,-21.75) 47.158,-20.842 U1.38 ; v1(51.634,-26.134) 53.5,-28 53.5,-35.908 JP3.28
  Bottom Layer w0.2: v1(46.25,-21.75) 50.634,-26.134 v1(51.634,-26.134)
PA29: JP3.29 U1.41 | length 20.9
  Top Layer w0.2: U1.41 53.842,-19.342 56,-21.5 56,-29.5 54.864,-30.636 JP3.29
PA30: JP3.30 U1.42 | length 24.5
  Top Layer w0.2: U1.42 54.092,-18.842 56.5,-21.25 56.5,-30.25 56,-30.75 56,-35.948 JP3.30
PA31: JP3.31 U1.52 | length 32.1
  Top Layer w0.2: U1.52 v1(46.147,-11.5) ; v1(56.75,-18.75) 57,-19 57,-30.25 57.404,-30.654 JP3.31
  Bottom Layer w0.2: v1(46.147,-11.5) 47.25,-11.5 49.75,-14 52,-14 v1(56.75,-18.75)
SCL: R10.1 U1.36 U2.6 U3.6 | length 48.1
  Top Layer w0.2: U1.36 52.592,-21.842 v1(55.25,-24.5)
  Top Layer w0.25: v1(71.5,-21.25) 72,-21.25 72.75,-20.5 72.75,-19.25 72.068,-18.568 69.818,-18.568 69.25,-18 69.25,-9.5 69.834,-8.916 72.334,-8.916 73.122,-8.128 R10.1
  Bottom Layer w0.2: v1(55.25,-24.5) 57.25,-26.5 68.25,-26.5 71.5,-23.25 v1(71.5,-21.25)
SDA: R9.1 U1.43 U2.5 U3.5 | length 44.2
  Top Layer w0.2: U1.43 v1(54.658,-18.342)
  Top Layer w0.25: v1(68.25,-13.25) 68.25,-18.25 69.838,-19.838 U2.5 71.176,-20.074 v1(70,-21.25) ; v1(70.25,-12.25) 71.176,-11.324 U3.5 73.686,-10.186 R9.1
  Bottom Layer w0.2: v1(54.658,-18.342) 59.566,-23.25 62.5,-23.25 63.699,-24.449 64.25,-25 67.75,-25 70,-22.75 v1(70,-21.25)
  Bottom Layer w0.25: v1(68.25,-13.25) 69.25,-12.25 v1(70.25,-12.25)
VCC1V8: C4.1 C7.2 C13.2 C14.2 C16.1 C27.2 U1.8 U1.12 U1.24 U1.54 U1.64 | length 81
  Top Layer w0.25: U1.12 40.592,-21.342 v1(41,-21.75) 41.5,-21.75 43.647,-23.897 U1.24 ; U1.8 40.092,-19.342 v1(41,-20.25) ; U1.64@40.097,-13.967 U1.64 ; U1.54 45.147,-15 46.161,-16.014 v1(46.736,-16.014)
  Top Layer w0.4: v1(24.5,-22.75) 24.5,-21.5 25.432,-20.568 C27.2 ; v1(29,-24) 30.156,-24 30.656,-23.5 C14.2 v1(31.75,-22.86) ; C13.2 v1(31.75,-20.828) ; C7.2@36.95,-13.208 36.992,-13.25 38.5,-13.25 39.217,-13.967 U1.64@40.097,-13.967 ; v1(41,-20.25) v1(41,-21.75) v1(46.736,-16.014) ; C16.1 43.86,-29.89 v1(44.25,-29.5)
  Bottom Layer w0.4: v1(24.5,-22.75) 25.75,-24 v1(29,-24) ; v1(31.75,-22.86) 39.89,-22.86 v1(41,-21.75) 44.25,-25 v1(44.25,-29.5) ; v1(31.75,-20.828) 32.328,-20.25 v1(41,-20.25) ; v1(38,-13.25) 43.972,-13.25 v1(46.736,-16.014) C4.1
VCC3V3: C1.1 C3.1 C6.2 C9.1 C10.2 C11.1 C12.2 C15.1 C17.2 C20.1 C22.1 C26.2 C28.1 C29.1 C30.1 C31.2 J2.1 JP3.1 JP3.2 JP4.1 R2.2 R3.2 R4.2 R5.2 R6.2 R7.2 R9.2 R10.2 R22.2 R23.2 U1.7 U1.18 U1.45 U1.58 U1.59 U2.8 U3.8 U4.16 U5.8 U6.4 | length 514.2
  Top Layer w0.2: 76.2,-1.05 76.25,-1
  Top Layer w0.25: U1.7 40.908,-18.842 v1(41,-18.75) ; v2(38.5,-25.75) 38.5,-25 39.75,-23.75 40.5,-23.75 40.647,-23.897 40.647,-26.853 39.75,-27.75 39.75,-29.162 C17.2 ; v1(42,-11) 42.647,-11.647 v1@42.647,-16.053 ; v1(42.672,-16.078) 43.147,-15.603 U1.58 ; U1.45 52.586,-17.342 C10.2
  Top Layer w0.3: 19.304,-35.75 22.5,-35.75 22.5,-35.7 23.2,-35 23.2,-33.8 23.876,-33.124 U6.4
  Top Layer w0.4: C30.1 17.272,-34.544 JP3.1 ; v2(26,-2.5) 26,-1 ; C6.2 v2(28.116,-4.616) ; 70.91,-1 C11.1 C11.1@71,-2.2 ; U3.8 74.02,-6.376 R10.2 ; U2.8@71.204,-16 73.688,-16 C9.1 R6.2@77.628,-16.536 ; 75.478,-6.228 75.739,-6.489
  Top Layer w0.5: R7.2 29.088,-16.932 30.656,-18.5 C12.2 v1(31.75,-18.796) ; 70.91,-1 70.91,-0.84 71,-0.75 ; U5.8 66.73,-33.02 66.25,-33.5 66.25,-35.5 66.5,-35.75 70,-35.75 70.826,-36.576 C15.1 74.168,-37.168 74.75,-37.75 78.356,-37.75 C28.1 ; R4.2 R2.2 ; v2(79.25,-34.75) 79.25,-36.296 C28.1 ; C28.1@79.53,-35.97 C28.1 ; R22.2 85.714,-34.036 v2(85.75,-34) 87,-34
  Top Layer w1: JP3.2 15.638,-40.75 5.25,-40.75 1.5,-37 1.5,-27.174 C29.1 4.572,-25.572 7.25,-28.25 12.5,-28.25 16.204,-24.546 21.704,-24.546 22.352,-23.898 C22.1 22.733,-22.479 U4.16 24.508,-18.04 27.304,-18.04 R7.2 ; JP3.1 19.304,-38.304 21.5,-40.5 84,-40.5 87,-37.5 87,-4 84,-1 23,-1 21.572,-2.428 C20.1@21.572,-4.428 ; v2(42,-2.25) 42,-1 ; C10.2 53.672,-14.328 55.25,-12.75 65,-12.75 67.25,-15 67.25,-20.75 68.75,-22.25 72.5,-22.25 73.5,-21.25 75.25,-21.25 76.25,-20.25 76.25,-17.75 77.236,-16.764 R6.2 77.856,-1.894 78.75,-1 ; C31.2 61,-2.876 61,-1 ; R9.2 75.182,-12.568 76,-11.75 76,-6.228 ; R10.2 77.48,-6.228 R2.2 ; R23.2 74.25,-2.082 74.25,-1
  Bottom Layer w0.25: v1(31.75,-18.796) v1@31.796,-18.75
  Bottom Layer w0.3: v2(38.5,-25.75) 38.5,-40 v2(39,-40.5)
  Bottom Layer w0.4: v2(26,-2.5) v2(28.116,-4.616)
  Bottom Layer w0.5: v2(38.5,-25.75) 37.75,-25 17,-25 15.25,-23.25 15.25,-20 16.454,-18.796 40.954,-18.796 v1(41,-18.75) v1@41,-18.672 ; v1(42,-11) v2(42,-2.25) ; v1(42.672,-16.078) C1.1 C3.1 ; v2(79.25,-34.75) 80,-34 v2(85.75,-34)
  Bottom Layer w1: v2(42,-2.25) 49.494,-2.25 J2.1 51.25,-7.17 51.25,-10.102 JP4.1
  other v2: 18.666,-24.534
pads on no net: J1.1 J1.4 J1.6 J1.7 J1.8 J1.9 J1.10 J1.11 J2.0 U4.7 U4.8 U4.9 U4.10
copper on no net: | length 45
  Bottom Layer w0.25: 16,-30.9 16.1,-30.9 ; 48.75,-8 50.25,-9.5 ; 49.75,-6.25 50,-6 50.25,-6 ; 49.75,-5.25 49.931,-5.431 49.931,-5.569 50,-5.5 ; 62.75,-3.75 62.75,-2.25 65,-2.25 ; 70,-2.25 70.25,-2.25 70.25,-5 ; 78.65,-16.8 78.65,-16.7 ; 50,-5.75 50,-5.5 ; 50,-5.75 49.75,-6 50.25,-6 ; 50,-5.75 50.25,-6 ; 50,-5.75 50,-5.5 ; 50,-5.5 50.25,-5.75 50.5,-5.75 ; 50.5,-5.75 50.75,-5.75 ; 50.5,-5.75 49.5,-4.75 49.75,-5 49.75,-6.719 49.75,-6.5 50.5,-5.75 ; 50.75,-5.75 49.5,-4.5 49.5,-6.75 49.5,-7 50.75,-5.75 ; 15,-30.25 15.25,-30.25 17,-30.25 16,-31.25 15,-30.25 ; 78,-17.8 78,-17.55 78,-15.8 79,-16.8 78,-17.8
  Bottom Layer w0.254: 70.256,-5.002 cw(c66.625,-15.625) 76.107,-9.615
  Bottom Layer w0.5: 15.5,-30.5 16.5,-30.5 16.1,-30.9 ; 15.6,-30.5 16,-30.9 ; 78.25,-17.3 78.25,-16.3 78.65,-16.7 ; 78.25,-17.2 78.65,-16.8

## Polygon pours and split planes (outlines as drawn)
VCC3V3 on Top Layer (hatched 45Degree grid 0 track 0.2, remove dead copper): 18.75,-33.75 21,-33.75 21,-38.25 22,-39.25 22.75,-40 83.75,-40 86.5,-37.25 86.5,-5 83.5,-2 43.5,-2 43,-2.5 41.5,-2.5 40.75,-1.75 27.5,-1.75 26.25,-3 22.5,-3 22.5,-4.25 20.5,-4.25 20.5,-0.25 87.75,-0.25 87.75,-41.75 0.25,-41.75 0.25,-23 5.5,-23 5.5,-25.5 7.75,-27.75 12.5,-27.75 16.25,-24 21.5,-24 22,-23.5 22,-17 27,-17 28.5,-15.5 30,-15.5 30,-17 31.25,-18.25 32.25,-18.25 32.25,-19.25 25.25,-19.25 24,-20.5 23.5,-21 23.5,-25 17.25,-25 15.75,-26.5 13.25,-29 2.75,-29 2.75,-36 5.25,-38.5 16.75,-38.5 17.75,-37.5 17.75,-33.75
VCC3V3 on Top Layer (hatched 45Degree grid 0 track 0.2, remove dead copper): 37.5,-40.5 37.5,-23.75 41,-23.75 41.5,-24.25 41.5,-26.5 39.75,-29.75 39.75,-40.5
VCC1V8 on Top Layer (hatched 45Degree grid 0 track 0.2, remove dead copper): 39.75,-22.25 39.75,-19.342 41.5,-19.342 42,-18.842 45.147,-15.695 45.147,-15 46.5,-15 47,-15.5 47,-16 41.963,-21.037 41.963,-22.213 43.647,-23.897 41.5,-23.897 39.853,-22.25
GND on Top Layer (hatched 45Degree grid 0 track 0.2, remove dead copper): 0.25,-0.25 87.7,-0.25 87.7,-41.7 0.3,-41.7 0.3,-0.25
VCC3V3 on Bottom Layer (hatched 45Degree grid 0 track 0.2, remove dead copper): 42.75,-1.75 42.75,-15.495 35.5,-15.495 35.5,-1.25 42.75,-1.25
VCC3V3 on Bottom Layer (hatched 45Degree grid 0 track 0.2, remove dead copper): 42.25,-26 14.75,-26 14.75,-15.25 44.35,-15.25 44.35,-26
VCC3V3 on Bottom Layer (hatched 45Degree grid 0 track 0.2, remove dead copper): 37.5,-40.5 37.5,-24.5 38.25,-23.75 40.75,-23.75 41.25,-24.25 40,-30.5 40,-41 37.5,-41
VCC3V3 on Bottom Layer (hatched 45Degree grid 0 track 0.2, remove dead copper): 39.75,-18.796 39.75,-15.25 44.5,-15.25 45.25,-16 45.25,-17.75 41.75,-17.75 41.75,-18.75 39.75,-18.75
GND on Bottom Layer (hatched 45Degree grid 0 track 0.2, remove dead copper): 0.25,-0.25 87.75,-0.25 87.75,-41.75 0.25,-41.75

## Keep-outs
Keep-Out Layer:
  the board outline again, w0

## Other copper
Bottom Layer:
  text "+" at 72,-3.75 h1 r90
  text "0V" at 60.25,-4 h1.2
  text "J1" at 3.25,-4.75 h1.2
  text "BAT1" at 76.75,-4.75 h1.2
  text "3.3V" at 48.5,-6.25 h1.2
  text "JP1" at 78.3,-7.4 h1.2
  text "JP4" at 48.25,-8.25 h1.2
  text "Open H/W 04/2013" at 31.75,-9.5 h1.2
  text "C4" at 49.8,-21.1 h1.2
  text "C1" at 46.5,-27 h1.2
  text "C3" at 49.25,-27 h1.2
  text "JP2" at 84.9,-27 h1.2
  text "JP3" at 76.3,-40.1 h1.2

## Silkscreen, mask and mechanical layers (free items; w line width, h text height)
Top Overlay:
  lines w0.25: 70.5,-5.75 72.75,-5.75 73.018,-5.75
  text "3.3V" at 49.75,-2.25 h1.2
  text "0V" at 55,-2.25 h1.2
  text "CPU board, Ver. 1.0" at 6.16,-16.84 h1 r90
  text "OSPLC1 Small Brick" at 4.118,-17.082 h1.2 r90
  text "StartingElectronics.com" at 2.168,-20.033 h1.2 r90
Drill Drawing:
  text ".LEGEND" at 93.08,-36.92 h1.52
  text "Drill Drawing." at 93.08,-39.46 h1.52

## Dimensions
0,-42 to 88,-42 on Mechanical 1
0,-42 to 0,0 on Mechanical 1

## Text inside footprints (layer, text, board x,y; h text height)
BAT1: Bottom Overlay "+" at 65.948,-1.776 h1.2 r270; Bottom Overlay "-" at 65.948,-28.376 h1.2 r270
J1: Bottom Overlay "6" at 5.426,-24.666 h1.5 r90; Bottom Overlay "9" at 5.426,-16.166 h1.5 r90; Bottom Overlay "5" at 14.676,-14.916 h1.5 r90; Bottom Overlay "1" at 14.676,-26.666 h1.5 r90